# Altium PCB 48QFP_Breakout.PcbDoc
Units mm, origin at the board's own origin, x right, y up, seen from the top; angles counter-clockwise.
Board outline 61.98 x 18.92 mm, 2 copper layers (Top Layer, Bottom Layer), stack 1.2 mm thick; 6 components, 49 nets, 99 pads, 0 vias.
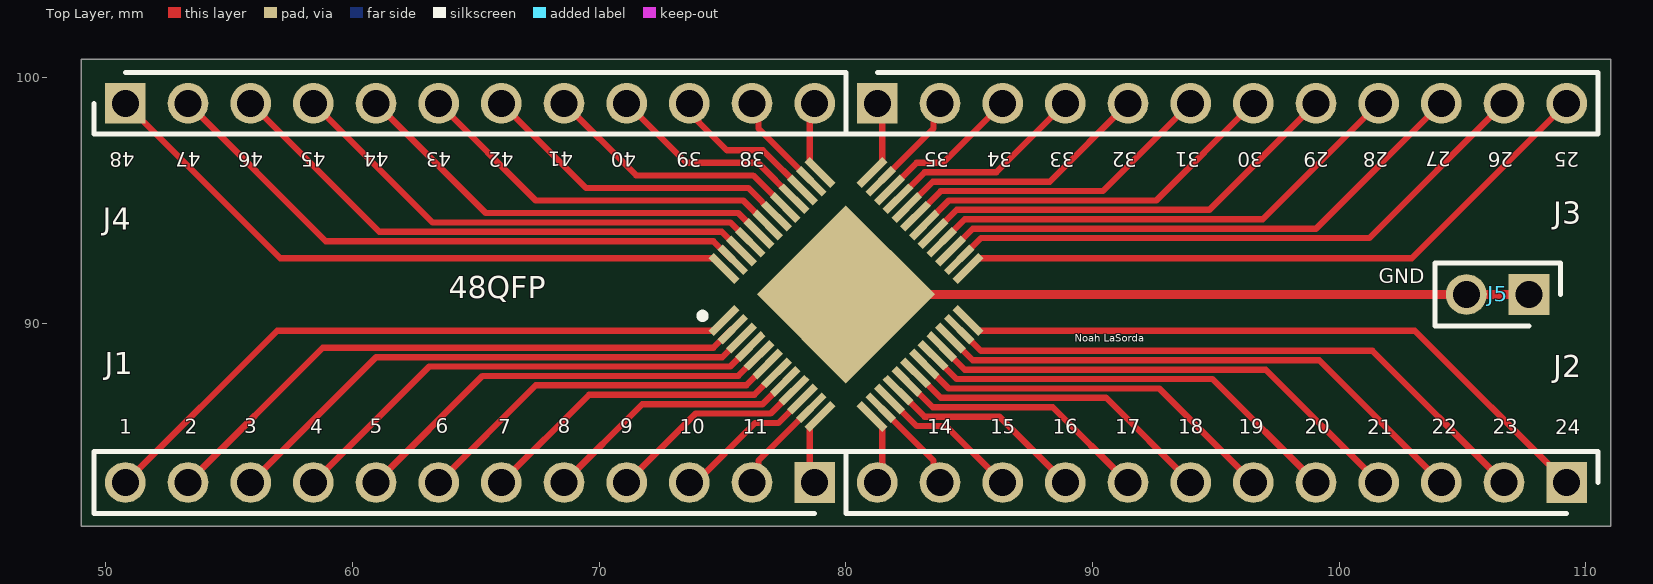
[diagram p0: Top Layer view]
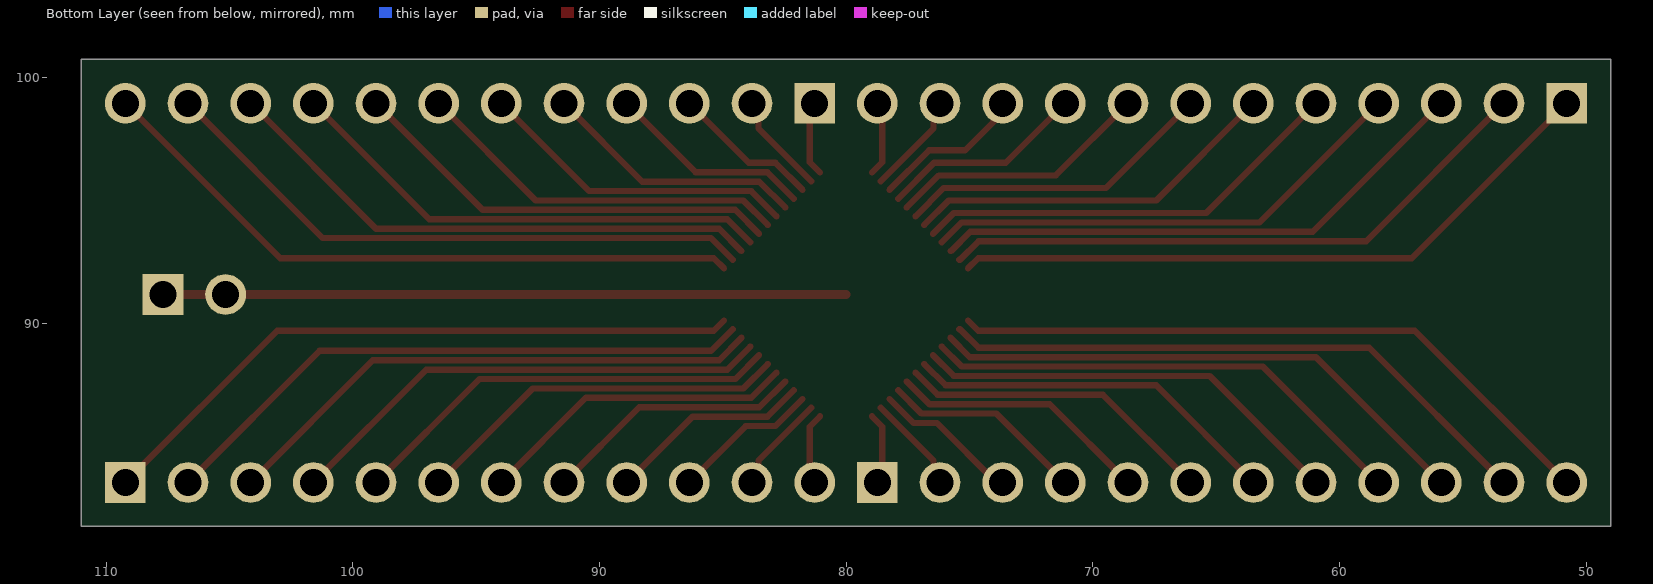
[diagram p1: Bottom Layer view, seen from below]
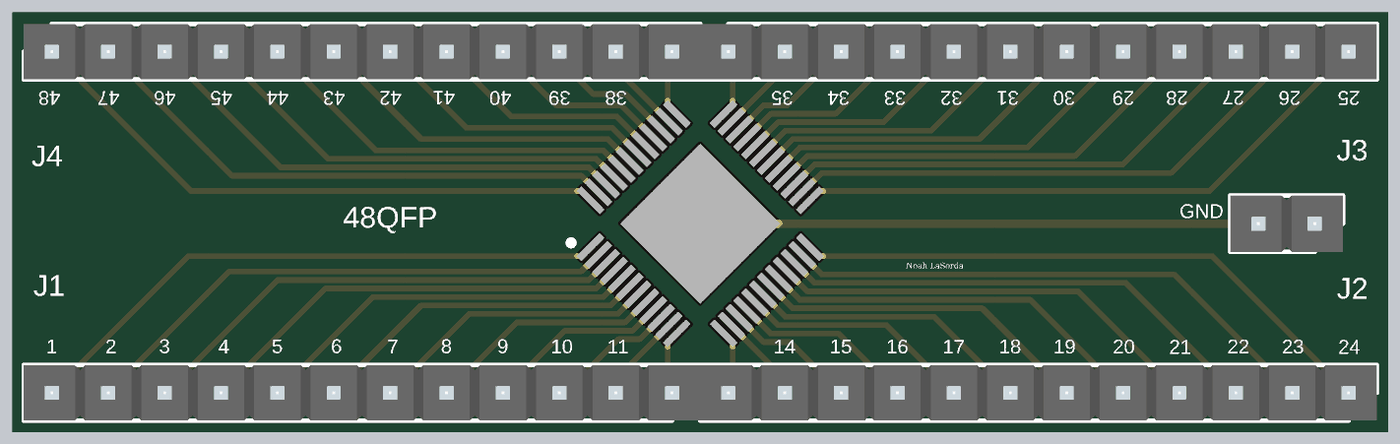
[diagram p2: 3D render of the assembled board from above, using the file's embedded part models]

## Layer stack, top to bottom
Top Solder: solder mask 0.0102, Solder Resist, Dk 3.5
Top Layer: signal copper 0.05
Dielectric 1: dielectric 1.1, FR-4, Dk 4.8
Bottom Layer: signal copper 0.05
Bottom Solder: solder mask 0.0102, Solder Resist, Dk 3.5

## Board outline
49.022,81.788 110.998,81.788 110.998,100.711 49.022,100.711

## Design rules (kind name [scope] priority, off if disabled: settings)
Clearance [All] p1: gap=0.254 ignorepadtopadclearanceinfootprint=FALSE except(0.127: Arc-Arc Arc-Track Arc-SMDPad Track-Track Track-SMDPad SMDPad-SMDPad)
PolygonConnect [All] p1: connectstyle=Relief reliefconductorwidth=0.254 reliefentries=4 polygonreliefangle="90 Angle" airgapwidth=0.254
RoutingVias [All] p1: holewidth=0.711 width=1.27 viastyle="Through Hole" minholewidth=0.711 minwidth=1.27 maxholewidth=0.711 maxwidth=1.27
SolderMaskExpansion [All] p1: expansion=0.102 istentingtop=FALSE
Width [All] p1: maxlimit=1.016 minlimit=0.254 preferedwidth=0.254 bottomlayer_maxwidth=0.254 minimp=50.000000 maximp=50.000000 favimp=50.000000
30 further rules are at their usual default settings.

## Components (designator, comment, footprint, x,y, rotation, side; value= is the part's Value field where it differs from the comment)
48QFP "TMC2100-TA" QFP50P900X900X120-49N 80.01,91.186 r45 top
J1 "PH1-12-UA" HDRV12W64P0X254_1X12_3048X250X847P 78.74,83.566 r180 top
J2 "PH1-12-UA" HDRV12W64P0X254_1X12_3048X250X847P 109.22,83.566 r180 top
J3 "PH1-12-UA" HDRV12W64P0X254_1X12_3048X250X847P 81.28,98.933 r0 top
J4 "PH1-12-UA" HDRV12W64P0X254_1X12_3048X250X847P 50.8,98.933 r0 top
J5 "M20-9990245" HDRV2W64P0X254_1X2_508X254X864P 107.696,91.186 r180 top

## Footprints (in the part's own frame and the unit in brackets; to place one, negate y for a bottom-side part, rotate by r counter-clockwise, add the part's x,y. Pads: shape width x height; smd on the part's side, far side on the other; paste and mask are expansions set on the pad)
HDRV2W64P0X254_1X2_508X254X864P [mm]
  rect 1.65x1.65 hole 1.1: 1(0,0)
  round 1.65 hole 1.1: 2(2.54,0)
  silkscreen extent -1.27,-1.27 3.81,1.27, body extent -1.27,-1.27 3.81,1.27, height 8.64
HDRV12W64P0X254_1X12_3048X250X847P [mm]
  rect 1.65x1.65 hole 1.1: 1(0,0)
  round 1.65 hole 1.1: 2(2.54,0) 3(5.08,0) 4(7.62,0) 5(10.16,0) 6(12.7,0) 7(15.24,0) 8(17.78,0) 9(20.32,0) 10(22.86,0) 11(25.4,0) 12(27.94,0)
  silkscreen extent -1.27,-1.25 29.21,1.25, body extent -1.27,-1.25 29.21,1.25, height 8.47
QFP50P900X900X120-49N [mm]
  rect 1.475x0.3 smd: 1(-4.238,2.75) 2(-4.238,2.25) 3(-4.238,1.75) 4(-4.238,1.25) 5(-4.238,0.75) 6(-4.238,0.25) 7(-4.238,-0.25) 8(-4.238,-0.75) 9(-4.238,-1.25) 10(-4.238,-1.75) 11(-4.238,-2.25) 12(-4.238,-2.75) 25(4.238,-2.75) 26(4.238,-2.25) 27(4.238,-1.75) 28(4.238,-1.25) 29(4.238,-0.75) 30(4.238,-0.25) 31(4.238,0.25) 32(4.238,0.75) 33(4.238,1.25) 34(4.238,1.75) 35(4.238,2.25) 36(4.238,2.75)
  rect 0.3x1.475 smd: 13(-2.75,-4.238) 14(-2.25,-4.238) 15(-1.75,-4.238) 16(-1.25,-4.238) 17(-0.75,-4.238) 18(-0.25,-4.238) 19(0.25,-4.238) 20(0.75,-4.238) 21(1.25,-4.238) 22(1.75,-4.238) 23(2.25,-4.238) 24(2.75,-4.238) 37(2.75,4.238) 38(2.25,4.238) 39(1.75,4.238) 40(1.25,4.238) 41(0.75,4.238) 42(0.25,4.238) 43(-0.25,4.238) 44(-0.75,4.238) 45(-1.25,4.238) 46(-1.75,4.238) 47(-2.25,4.238) 48(-2.75,4.238)
  rect 5.1x5.1 smd: 49(0,0)
  silkscreen extent -4.85,3.38 -4.6,3.62, body extent 0,0 0,0, height 0.7

## Part data
48QFP: "Integrated Circuit", Manufacturer_Name="Analog Devices", Mouser Part Number=700-TMC2100TA, Datasheet Link=https://www.analog.com/media/en/technical-documentation/data-sheets/TMC2100_datasheet_rev1.13.pdf, Height=1.2mm, Manufacturer_Part_Number=TMC2100-TA, Mouser Price/Stock=https://www.mouser.co.uk/ProductDetail/ADI-Trinamic/TMC2100-TA?qs=TiOZkKH1s2TKxin%252BmphkEw%3D%3D
J1 J2 J3 J4: "Connector", Manufacturer_Name="Adam Tech", Mouser Part Number=737-PH1-12-UA, Arrow Part Number=PH1-12-UA, Arrow Price/Stock=https://www.arrow.com/en/products/ph1-12-ua/adam-tech?region=nac, Datasheet Link=https://www.arrow.com/en/products/ph1-12-ua/adam-tech?region=nac, Height=8.469mm, Manufacturer_Part_Number=PH1-12-UA, Mouser Price/Stock=https://www.mouser.co.uk/ProductDetail/Adam-Tech/PH1-12-UA?qs=HoCaDK9Nz5f4jFrqzX%252Bs7Q%3D%3D
J5: "Connector", Manufacturer_Name=Harwin, Mouser Part Number=855-M20-9990245, Datasheet Link=https://cdn.harwin.com/pdfs/M20-999.pdf, Height=8.64mm, Manufacturer_Part_Number=M20-9990245, Mouser Price/Stock=https://www.mouser.co.uk/ProductDetail/Harwin/M20-9990245?qs=Jph8NoUxIfUDXEB%252Bi9kJRA%3D%3D

## Nets (pads, with @x,y where several pads share a name; then routed paths per layer and width w, separated by ;. In a path a pad name is that pad's centre, name@x,y a point inside that pad or via, vN(x,y) a via of type N, cw(c..) or ccw(c..) an arc to the next point about the centre after c; other vN are vias at no path point)
Net48QFP_1: 48QFP.1 J1.12 | length 27
  Top Layer w0.254: J1.12 56.952,89.718 74.653,89.718 48QFP.1
Net48QFP_2: 48QFP.2 J1.11 | length 24.7
  Top Layer w0.254: J1.11 58.801,89.027 74.636,89.027 75.39,89.78 48QFP.2
Net48QFP_3: 48QFP.3 J1.10 | length 22.3
  Top Layer w0.254: J1.10 60.96,88.646 74.995,88.646 48QFP.3
Net48QFP_4: 48QFP.4 J1.9 | length 20
  Top Layer w0.254: J1.9 63.119,88.265 75.321,88.265 48QFP.4
Net48QFP_5: 48QFP.5 J1.8 | length 17.7
  Top Layer w0.254: J1.8 65.278,87.884 75.647,87.884 48QFP.5
Net48QFP_6: 48QFP.6 J1.7 | length 15.3
  Top Layer w0.254: J1.7 67.437,87.503 75.973,87.503 48QFP.6
Net48QFP_7: 48QFP.7 J1.6 | length 13
  Top Layer w0.254: J1.6 69.596,87.122 76.3,87.122 48QFP.7
Net48QFP_8: 48QFP.8 J1.5 | length 10.7
  Top Layer w0.254: J1.5 71.755,86.741 76.626,86.741 48QFP.8
Net48QFP_9: 48QFP.9 J1.4 | length 8.3
  Top Layer w0.254: J1.4 73.914,86.36 76.952,86.36 48QFP.9
Net48QFP_10: 48QFP.10 J1.3 | length 6
  Top Layer w0.254: J1.3 73.914,83.566 76.327,85.979 77.278,85.979 48QFP.10
Net48QFP_11: 48QFP.11 J1.2 | length 4
  Top Layer w0.254: J1.2 76.467,83.833 76.467,84.461 48QFP.11
Net48QFP_12: 48QFP.12 J1.1 | length 2.9
  Top Layer w0.254: J1.1 78.542,83.764 78.542,85.829 48QFP.12
Net48QFP_13: 48QFP.13 J2.12 | length 2.9
  Top Layer w0.254: 48QFP.13 81.478,85.829 81.478,83.764 J2.12
Net48QFP_14: 48QFP.14 J2.11 | length 4
  Top Layer w0.254: 48QFP.14 83.553,84.461 83.553,83.833 J2.11
Net48QFP_15: 48QFP.15 J2.10 | length 6
  Top Layer w0.254: 48QFP.15 82.869,85.852 84.074,85.852 J2.10
Net48QFP_16: 48QFP.16 J2.9 | length 8.3
  Top Layer w0.254: 48QFP.16 83.195,86.233 86.233,86.233 J2.9
Net48QFP_17: 48QFP.17 J2.8 | length 10.7
  Top Layer w0.254: 48QFP.17 83.521,86.614 88.392,86.614 J2.8
Net48QFP_18: 48QFP.18 J2.7 | length 13
  Top Layer w0.254: 48QFP.18 83.847,86.995 90.551,86.995 J2.7
Net48QFP_19: 48QFP.19 J2.6 | length 15.3
  Top Layer w0.254: 48QFP.19 84.174,87.376 92.71,87.376 J2.6
Net48QFP_20: 48QFP.20 J2.5 | length 17.7
  Top Layer w0.254: 48QFP.20 84.5,87.757 94.869,87.757 J2.5
Net48QFP_21: 48QFP.21 J2.4 | length 20
  Top Layer w0.254: 48QFP.21 84.826,88.138 97.028,88.138 J2.4
Net48QFP_22: 48QFP.22 J2.3 | length 22.3
  Top Layer w0.254: 48QFP.22 85.152,88.519 99.187,88.519 J2.3
Net48QFP_23: 48QFP.23 J2.2 | length 24.7
  Top Layer w0.254: 48QFP.23 85.478,88.9 101.346,88.9 J2.2
Net48QFP_24: 48QFP.24 J2.1 | length 27
  Top Layer w0.254: 48QFP.24 85.367,89.718 103.068,89.718 J2.1
Net48QFP_25: 48QFP.25 J3.12 | length 27
  Top Layer w0.254: 48QFP.25 85.367,92.654 102.941,92.654 J3.12
Net48QFP_26: 48QFP.26 J3.11 | length 24.7
  Top Layer w0.254: 48QFP.26 85.478,93.472 101.219,93.472 J3.11
Net48QFP_27: 48QFP.27 J3.10 | length 22.4
  Top Layer w0.254: 48QFP.27 85.152,93.853 99.06,93.853 J3.10
Net48QFP_28: 48QFP.28 J3.9 | length 20
  Top Layer w0.254: 48QFP.28 84.826,94.234 96.901,94.234 J3.9
Net48QFP_29: 48QFP.29 J3.8 | length 17.7
  Top Layer w0.254: 48QFP.29 84.5,94.615 94.742,94.615 J3.8
Net48QFP_30: 48QFP.30 J3.7 | length 15.4
  Top Layer w0.254: 48QFP.30 84.174,94.996 92.583,94.996 J3.7
Net48QFP_31: 48QFP.31 J3.6 | length 13
  Top Layer w0.254: 48QFP.31 83.847,95.377 90.424,95.377 J3.6
Net48QFP_32: 48QFP.32 J3.5 | length 10.7
  Top Layer w0.254: 48QFP.32 83.521,95.758 88.265,95.758 J3.5
Net48QFP_33: 48QFP.33 J3.4 | length 8.4
  Top Layer w0.254: 48QFP.33 83.195,96.139 86.106,96.139 J3.4
Net48QFP_34: 48QFP.34 J3.3 | length 6
  Top Layer w0.254: 48QFP.34 82.869,96.52 83.947,96.52 J3.3
Net48QFP_35: 48QFP.35 J3.2 | length 4.2
  Top Layer w0.254: 48QFP.35 83.553,97.911 83.553,98.666 J3.2
Net48QFP_36: 48QFP.36 J3.1 | length 3.1
  Top Layer w0.254: 48QFP.36 81.478,96.543 81.478,98.735 J3.1
Net48QFP_37: 48QFP.37 J4.12 | length 3.1
  Top Layer w0.254: J4.12 78.542,98.735 78.542,96.543 48QFP.37
Net48QFP_38: 48QFP.38 J4.11 | length 4.2
  Top Layer w0.254: J4.11 76.467,98.666 76.467,97.911 48QFP.38
Net48QFP_39: 48QFP.39 J4.10 | length 6.3
  Top Layer w0.254: J4.10 73.66,98.555 74.068,98.147 74.068,98.144 75.184,97.028 76.643,97.028 48QFP.39
Net48QFP_40: 48QFP.40 J4.9 | length 8.4
  Top Layer w0.254: J4.9 73.533,96.52 76.444,96.52 48QFP.40
Net48QFP_41: 48QFP.41 J4.8 | length 10.7
  Top Layer w0.254: J4.8 71.501,96.012 76.245,96.012 48QFP.41
Net48QFP_42: 48QFP.42 J4.7 | length 13
  Top Layer w0.254: J4.7 69.469,95.504 76.046,95.504 48QFP.42
Net48QFP_43: 48QFP.43 J4.6 | length 15.4
  Top Layer w0.254: J4.6 67.437,94.996 75.846,94.996 48QFP.43
Net48QFP_44: 48QFP.44 J4.5 | length 17.7
  Top Layer w0.254: J4.5 65.405,94.488 75.647,94.488 48QFP.44
Net48QFP_45: 48QFP.45 J4.4 | length 20
  Top Layer w0.254: J4.4 63.246,94.107 75.321,94.107 48QFP.45
Net48QFP_46: 48QFP.46 J4.3 | length 22.4
  Top Layer w0.254: J4.3 61.087,93.726 74.975,93.726 75.755,92.945 48QFP.46
Net48QFP_47: 48QFP.47 J4.2 | length 24.7
  Top Layer w0.254: J4.2 58.928,93.345 74.636,93.345 75.39,92.592 48QFP.47
Net48QFP_48: 48QFP.48 J4.1 | length 27
  Top Layer w0.254: J4.1 57.079,92.654 74.653,92.654 48QFP.48
Net48QFP_49: 48QFP.49 J5.1 J5.2 | length 27.7
  Top Layer w0.381: 48QFP.49 J5.2 J5.1

## Silkscreen, mask and mechanical layers (free items; w line width, h text height)
Top Overlay:
  text "48" at 51.181,97.155 h1.02 r180
  text "47" at 53.848,97.155 h1.02 r180
  text "46" at 56.388,97.155 h1.02 r180
  text "45" at 58.928,97.155 h1.02 r180
  text "44" at 61.468,97.155 h1.02 r180
  text "43" at 64.008,97.155 h1.02 r180
  text "42" at 66.548,97.155 h1.02 r180
  text "41" at 68.961,97.166 h1.02 r180
  text "40" at 71.501,97.155 h1.02 r180
  text "39" at 74.168,97.155 h1.02 r180
  text "38" at 76.708,97.155 h1.02 r180
  text "35" at 84.201,97.155 h1.02 r180
  text "34" at 86.741,97.155 h1.02 r180
  text "33" at 89.281,97.155 h1.02 r180
  text "32" at 91.821,97.155 h1.02 r180
  text "31" at 94.361,97.155 h1.02 r180
  text "30" at 96.901,97.155 h1.02 r180
  text "29" at 99.569,97.155 h1.02 r180
  text "28" at 101.982,97.155 h1.02 r180
  text "27" at 104.522,97.166 h1.02 r180
  text "26" at 107.062,97.155 h1.02 r180
  text "25" at 109.729,97.155 h1.02 r180
  text "GND" at 101.6,91.44 h1.02
  text "Noah LaSorda" at 89.281,89.17 h0.51
  text "1" at 50.546,85.344 h1.02
  text "2" at 53.212,85.344 h1.02
  text "3" at 55.626,85.355 h1.02
  text "4" at 58.293,85.344 h1.02
  text "5" at 60.706,85.355 h1.02
  text "6" at 63.373,85.355 h1.02
  text "7" at 65.913,85.344 h1.02
  text "8" at 68.326,85.355 h1.02
  text "9" at 70.866,85.355 h1.02
  text "10" at 73.279,85.344 h1.02
  text "11" at 75.819,85.333 h1.02
  text "14" at 83.312,85.333 h1.02
  text "15" at 85.852,85.344 h1.02
  text "16" at 88.392,85.344 h1.02
  text "17" at 90.932,85.333 h1.02
  text "18" at 93.472,85.344 h1.02
  text "19" at 95.929,85.338 h1.02
  text "20" at 98.595,85.338 h1.02
  text "22" at 103.758,85.344 h1.02
  text "23" at 106.215,85.338 h1.02
  text "21" at 101.135,85.327 h1.02
  text "24" at 108.755,85.327 h1.02